# EAGLE board 12T_FULL_BRIDGE (EAGLE 9.1.3)
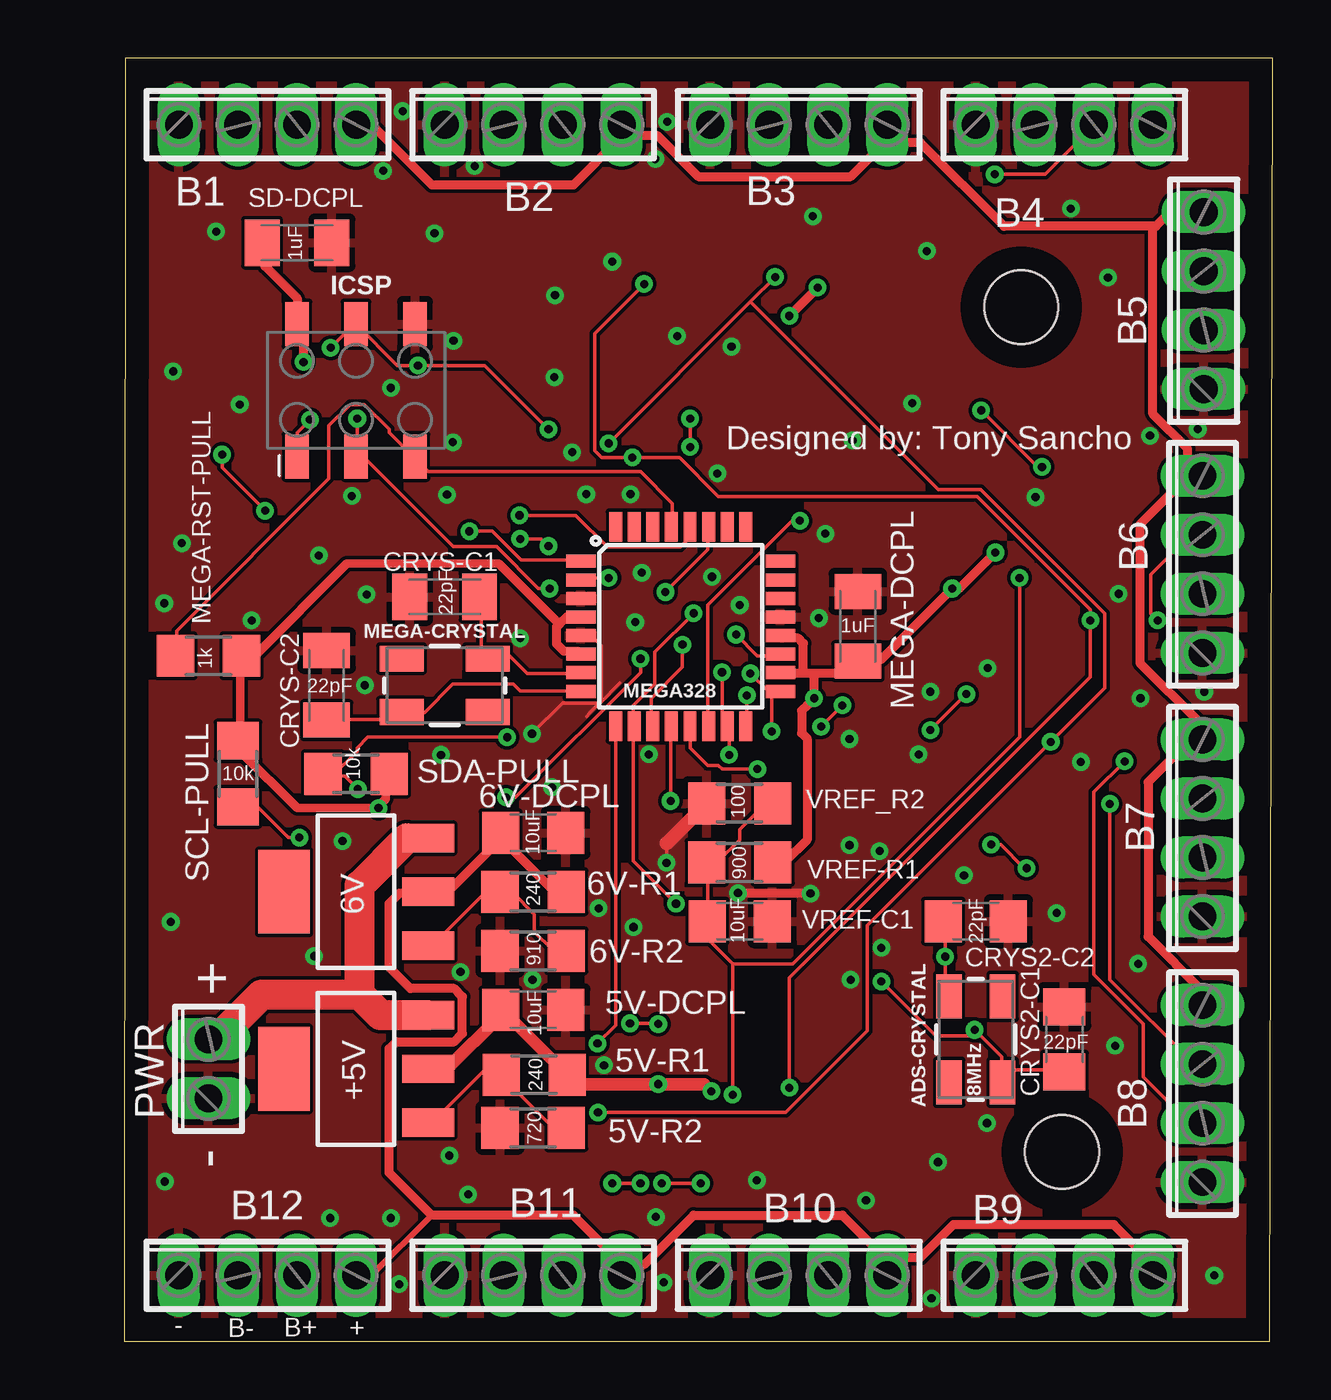
[diagram p0: board, top side]
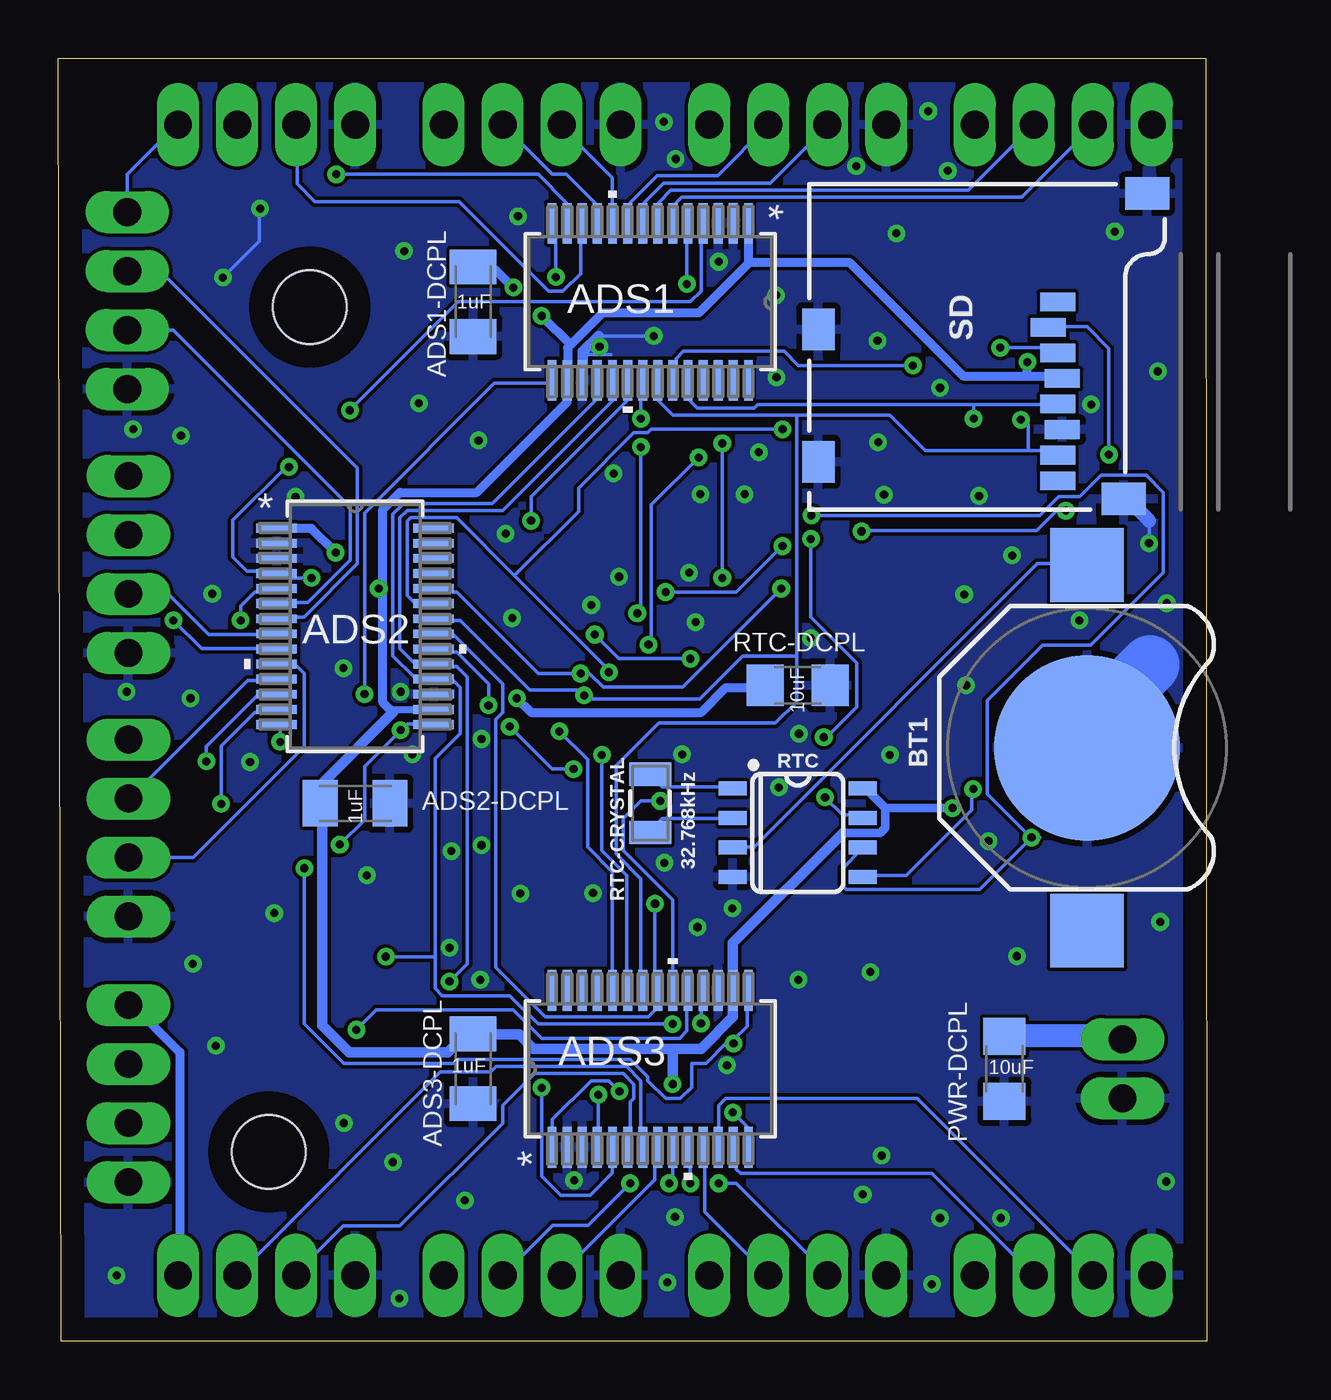
[diagram p1: board, bottom side, seen from below]

Size 49.43 x 55.25 mm. Coordinates in mm from the lower left corner, seen from the top.
Outline: 0,0 49.31,0 49.43,55.24 0.05,55.24 0,0
Copper layers (1*16): Top 0.035mm / dielectric 1.5mm / Bottom 0.035mm
Design rules "default": minimum track width 6mil, minimum drill 0.35mm, track to track 6mil, track to pad 6mil, pad to pad 6mil, via to via 6mil, smd to smd 6mil, copper to edge 40mil, drill to drill 6mil, minimum pad ring 10mil, minimum via ring 8mil, stop-mask expansion 4mil, vias tented up to drill 0mil, thermal gap 10mil
Holes 3.17 mm at 38.61,44.53 40.36,8.15

## Footprints (pad centres in the part's own frame; a part is rotated, then mirrored left to right if it is on the bottom)
C1206 = smd 1.6 x 1.8: 1 -1.4,0; 2 1.4,0
R1206 = smd 1.6 x 1.803: 1 -1.422,0; 2 1.422,0
SOT223 = smd 1.219 x 2.235: 1 -2.311,-3.099; 2 0,-3.099; 3 2.311,-3.099 | smd 3.6 x 2.2: 4 0,3.099
DB28-L = smd 1.753 x 0.381: 1 -3.378,4.225; 2 -3.378,3.575; 3 -3.378,2.925; 4 -3.378,2.275; 5 -3.378,1.625; 6 -3.378,0.975; 7 -3.378,0.325; 8 -3.378,-0.325; 9 -3.378,-0.975; 10 -3.378,-1.625; 11 -3.378,-2.275; 12 -3.378,-2.925; 13 -3.378,-3.575; 14 -3.378,-4.225; 15 3.378,-4.225; 16 3.378,-3.575; 17 3.378,-2.925; 18 3.378,-2.275; 19 3.378,-1.625; 20 3.378,-0.975; 21 3.378,-0.325; 22 3.378,0.325; 23 3.378,0.975; 24 3.378,1.625; 25 3.378,2.275; 26 3.378,2.925; 27 3.378,3.575; 28 3.378,4.225
C1206K = smd 1.5 x 2: 1 -1.5,0; 2 1.5,0
CRYSTAL-SMD-5X3.2-4PAD = smd 1.9 x 1.1: 1 -1.85,-1.15; 2 1.85,-1.15; 3 1.85,1.15; 4 -1.85,1.15
4POL254 = drill 1.2 long: 1 -3.81,0; 2 -1.27,0; 3 1.27,0; 4 3.81,0
BATTCON_12MM = smd 8 x 8: GND 0,0 | smd 3.175 x 3.175: PWR@1 -7.874,0; PWR@2 7.874,0
2X3_SMD = smd 1.02 x 1.9: 1 -2.54,-2.85; 2 -2.54,2.85; 3 0,-2.85; 4 0,2.85; 5 2.54,-2.85; 6 2.54,2.85
TQFP32-08 = smd 1.27 x 0.559: 1 -4.293,2.8; 2 -4.293,2; 3 -4.293,1.2; 4 -4.293,0.4; 5 -4.293,-0.4; 6 -4.293,-1.2; 7 -4.293,-2; 8 -4.293,-2.8; 17 4.293,-2.8; 18 4.293,-2; 19 4.293,-1.2; 20 4.293,-0.4; 21 4.293,0.4; 22 4.293,1.2; 23 4.293,2; 24 4.293,2.8 | smd 0.559 x 1.27: 9 -2.8,-4.293; 10 -2,-4.293; 11 -1.2,-4.293; 12 -0.4,-4.293; 13 0.4,-4.293; 14 1.2,-4.293; 15 2,-4.293; 16 2.8,-4.293; 25 2.8,4.293; 26 2,4.293; 27 1.2,4.293; 28 0.4,4.293; 29 -0.4,4.293; 30 -1.2,4.293; 31 -2,4.293; 32 -2.8,4.293
2POL254 = drill 1.2 long: 1 -1.27,0; 2 1.27,0
SO08-0.15 = smd 0.6 x 1.2: 1 -1.905,-2.8; 2 -0.635,-2.8; 3 0.635,-2.8; 4 1.905,-2.8; 5 1.905,2.8; 6 0.635,2.8; 7 -0.635,2.8; 8 -1.905,2.8
CRYSTAL-SMD-3.2X1.5MM = smd 1 x 1.8: P$1 -1.25,0; P$2 1.25,0
MICRO-SD-SOCKET = smd 1.8 x 1.4: CD1 -2.05,0.4; CD2 -7.75,0.4 | smd 0.8 x 1.5: CS -7.84,10.3; DI -6.74,10.7; DO -2.34,10.7; GND -3.44,10.9; RSV1 -8.94,10.7; RSV2 -1.24,10.7; SCLK -4.54,10.7; VCC -5.64,10.9 | smd 1.4 x 1.9: GND1 -13.6,14.55; GND3 -0.45,13.55

## Placement (x,y rotation side)
5V-DCPL  10uF  [C1206]  17.6,14.27 0 top
5V-R1  240  [R1206]  17.65,11.48 0 top
5V-R2  720  [R1206]  17.6,9.19 0 top
6V-DCPL  10uF  [C1206]  17.6,21.89 0 top
6V-R1  240  [R1206]  17.6,19.35 0 top
6V-R2  910  [R1206]  17.6,16.81 0 top
+5V  V_REG_317SMD  [SOT223]  9.98,11.73 90 top
ADS1  ADS1256IDBRDB28-L  [DB28-L]  23.95,44.75 270 bottom
ADS1-DCPL  1uF  [C1206K]  31.57,44.75 270 bottom
ADS2  ADS1256IDBRDB28-L  [DB28-L]  36.65,30.78 0 bottom
ADS2-DCPL  1uF  [C1206K]  36.65,23.16 0 bottom
ADS3  ADS1256IDBRDB28-L  [DB28-L]  23.95,11.73 90 bottom
ADS3-DCPL  1uF  [C1206K]  31.57,11.73 270 bottom
ADS-CRYSTAL  8MHz  [CRYSTAL-SMD-5X3.2-4PAD]  36.65,13 90 top
B1  [4POL254]  6.17,52.37 0 top
B2  [4POL254]  17.6,52.37 0 top
B3  [4POL254]  29.03,52.37 0 top
B4  [4POL254]  40.46,52.37 0 top
B5  [4POL254]  46.46,44.81 90 top
B6  [4POL254]  46.41,33.45 90 top
B7  [4POL254]  46.41,22.1 90 top
B8  [4POL254]  46.41,10.67 90 top
B9  [4POL254]  40.46,2.84 0 top
B10  [4POL254]  29.03,2.84 0 top
B11  [4POL254]  17.6,2.84 0 top
B12  [4POL254]  6.17,2.84 0 top
BT1  [BATTCON_12MM]  5.16,25.55 270 bottom
CRYS2-C1  22pF  [C1206]  40.46,13 90 top
CRYS2-C2  22pF  [C1206]  36.65,18.08 0 top
CRYS-C1  22pF  [C1206K]  13.79,32.05 0 top
CRYS-C2  22pF  [C1206K]  8.71,28.24 90 top
GAUGE  V_REG_317SMD  [SOT223]  9.98,19.35 90 top
ICSP  [2X3_SMD]  9.98,40.94 0 top
MEGA328  ATMEGA328P_TQFP  [TQFP32-08]  23.95,30.78 0 top
MEGA-CRYSTAL  16MHz  [CRYSTAL-SMD-5X3.2-4PAD]  13.79,28.24 0 top
MEGA-DCPL  1uF  [C1206K]  31.57,30.78 90 top
MEGA-RST-PULL  1k  [R1206]  3.63,29.51 0 top
PWR  [2POL254]  3.63,11.73 90 top
PWR-DCPL  10uF  [C1206]  8.71,11.73 90 bottom
RTC  DS1307Z  [SO08-0.15]  17.6,21.89 270 bottom
RTC-CRYSTAL  32.768kHz  [CRYSTAL-SMD-3.2X1.5MM]  23.95,23.16 90 bottom
RTC-DCPL  10uF  [C1206]  17.6,28.24 0 bottom
SCL-PULL  10k  [R1206]  4.9,24.43 90 top
SD  MICRO-SD_CARD_SOCKET  [MICRO-SD-SOCKET]  17.12,35.81 270 bottom
SD-DCPL  1uF  [C1206K]  7.44,47.29 0 top
SDA-PULL  10k  [R1206]  9.98,24.43 0 top
VREF-C1  10uF  [C1206]  26.49,18.08 0 top
VREF-R1  900  [R1206]  26.49,20.62 0 top
VREF_R2  100  [R1206]  26.49,23.16 0 top

## Library data of the parts
5V-DCPL 6V-DCPL ADS1-DCPL ADS2-DCPL ADS3-DCPL CRYS2-C1 CRYS2-C2 CRYS-C1 CRYS-C2 MEGA-DCPL PWR-DCPL RTC-DCPL VREF-C1 = rcl; SPICEPREFIX: C
5V-R1 5V-R2 6V-R1 6V-R2 MEGA-RST-PULL VREF-R1 VREF_R2 = rcl; SPICEPREFIX: R
+5V GAUGE = SparkFun-IC-Power
ADS1-ADS3 = ADS1256; MANUFACTURER_PART_NUMBER: ADS1256IDBR; VENDOR: Texas Instruments
ADS-CRYSTAL = SparkFun-Clocks; PROD_ID: XTAL-09431
B1-B12 PWR = con-phoenix-254; OC_FARNELL: unknown; OC_NEWARK: unknown
BT1 = SparkFun-Batteries; PROD_ID: BATT-08044; SF_SKU: PRT-10592
ICSP = SparkFun-Connectors; PROD_ID: CONN-11290
MEGA328 = SparkFun-IC-Microcontroller; PROD_ID: IC-09069
MEGA-CRYSTAL = SparkFun-Clocks; PROD_ID: XTAL-08218; SF_ID: COM-00094
RTC = SparkFun-Clocks; PROD_ID: IC-08138
RTC-CRYSTAL = SparkFun-Clocks; PROD_ID: XTAL-13062
SCL-PULL SD-DCPL SDA-PULL = resistor
SD = SparkFun-Connectors; PROD_ID: CONN-07820; SF_ID: PRT-00127

## Nets
+3V: BT1.PWR@1 RTC.3
+5V: 5V-DCPL.1 5V-R1.2 +5V.2 ADS1-DCPL.1 ADS1.1 ADS1.16 ADS2-DCPL.1 ADS2.1 ADS2.16 ADS3-DCPL.1 ADS3.1 ADS3.16 ICSP.2 MEGA328.4 MEGA328.6 MEGA328.18 MEGA328.20 MEGA-DCPL.1 MEGA-RST-PULL.2 RTC-DCPL.1 RTC.8 SCL-PULL.2 SD-DCPL.1 SD.VCC SDA-PULL.2 VREF-R1.2
+12V: +5V.3 GAUGE.3 PWR-DCPL.2 PWR.2
ADS1-CS: ADS1.20 MEGA328.14
ADS2-CS: ADS2.20 MEGA328.13
ADS3-CS: ADS3.20 MEGA328.12
ADS-DRDY: ADS1.21 ADS2.21 ADS3.21 MEGA328.10
ADS-RESET: ADS1.15 ADS2.15 ADS3.15 MEGA328.9
ADS-SYNC: ADS1.14 ADS2.14 ADS3.14 MEGA328.2
ADS-XTAL1: ADS1.19 ADS2.19 ADS3.19 ADS-CRYSTAL.1 CRYS2-C1.1
ADS-XTAL2: ADS1.18 ADS2.18 ADS3.18 ADS-CRYSTAL.3 CRYS2-C2.1
AINCOM: ADS1.5 ADS2.5 ADS3.5 MEGA328.11
B1+: ADS1.7 B1.3
B1-: ADS1.6 B1.2
B2+: ADS1.9 B2.3
B2-: ADS1.8 B2.2
B3+: ADS1.11 B3.3
B3-: ADS1.10 B3.2
B4+: ADS1.13 B4.3
B4-: ADS1.12 B4.2
B5+: ADS2.7 B5.3
B5-: ADS2.6 B5.2
B6+: ADS2.9 B6.3
B6-: ADS2.8 B6.2
B7+: ADS2.11 B7.3
B7-: ADS2.10 B7.2
B8+: ADS2.13 B8.3
B8-: ADS2.12 B8.2
B9+: ADS3.7 B9.3
B9-: ADS3.6 B9.2
B10+: ADS3.9 B10.3
B10-: ADS3.8 B10.2
B11+: ADS3.11 B11.3
B11-: ADS3.10 B11.2
B12+: ADS3.13 B12.3
B12-: ADS3.12 B12.2
GND: 5V-DCPL.2 5V-R2.1 6V-DCPL.2 6V-R2.1 ADS1-DCPL.2 ADS1.2 ADS1.3 ADS1.17 ADS2-DCPL.2 ADS2.2 ADS2.3 ADS2.17 ADS3-DCPL.2 ADS3.2 ADS3.3 ADS3.17 B1.1 B2.1 B3.1 B4.1 B5.1 B6.1 B7.1 B8.1 B9.1 B10.1 B11.1 B12.1 BT1.GND CRYS2-C1.2 CRYS2-C2.2 CRYS-C1.1 CRYS-C2.2 ICSP.6 MEGA328.3 MEGA328.5 MEGA328.21 MEGA-DCPL.2 PWR-DCPL.1 PWR.1 RTC-DCPL.2 RTC.4 SD-DCPL.2 SD.CD1 SD.CD2 SD.GND SD.GND1 SD.GND3 VREF-C1.2 VREF_R2.1
MEGA-RESET: ICSP.5 MEGA328.29 MEGA-RST-PULL.1
MEGA-XTAL1: CRYS-C1.2 MEGA328.7 MEGA-CRYSTAL.3
MEGA-XTAL2: CRYS-C2.1 MEGA328.8 MEGA-CRYSTAL.1
MISO: ADS1.22 ADS2.22 ADS3.22 ICSP.1 MEGA328.16 SD.DO
MOSI: ADS1.23 ADS2.23 ADS3.23 ICSP.4 MEGA328.15 SD.DI
N$5: 5V-R1.1 5V-R2.2 +5V.1
N$11: 6V-R1.1 6V-R2.2 GAUGE.1
N$19: RTC-CRYSTAL.P$2 RTC.1
N$20: RTC-CRYSTAL.P$1 RTC.2
SCK: ADS1.24 ADS2.24 ADS3.24 ICSP.3 MEGA328.17 SD.SCLK
SCL: MEGA328.28 RTC.6 SCL-PULL.1
SD-CS: MEGA328.1 SD.CS
SDA: MEGA328.27 RTC.5 SDA-PULL.1
SQW: MEGA328.19 RTC.7
VCC: 6V-DCPL.1 6V-R1.2 B1.4 B2.4 B3.4 B4.4 B5.4 B6.4 B7.4 B8.4 B9.4 B10.4 B11.4 B12.4 GAUGE.2
VREF: ADS1.4 ADS2.4 ADS3.4 VREF-C1.1 VREF-R1.1 VREF_R2.2

## Tracks (layer width: path | path; a pad name or v marks a point on that pad's centre or on a via)
+3V
  Bottom 0.152: RTC.3 20.4,21.28 19.48,21.28 7.29,33.48 5.21,33.48 BT1.PWR@1
+5V  (via drill 0.35)
  Top 0.152: 31.06,28.75 31.52,29.21 MEGA-DCPL.1 31.67,29.36 | 28.32,28.75 MEGA328.18 | 28.32,30.28 MEGA328.20 | 28.47,20.68 28.02,20.68 VREF-R1.2 | 6.07,47.19 SD-DCPL.1 | 19.63,31.19 MEGA328.4 | 5,25.86 SCL-PULL.2 5,25.7 5,25.4 | 5,29.51 MEGA-RST-PULL.2 5.61,29.51 | 10.64,22.96 10.8,23.11 10.91,23 v10.95,22.96 | 11.25,24.33 SDA-PULL.2 | 19.63,11.07 19.23,11.48 5V-R1.2 | 16.28,14.27 5V-DCPL.1 | 5V-R1.2 | 7.72,43.52 ICSP.2 | +5V.2 13.89,11.73 | 19.53,29.72 MEGA328.6
  Top 0.356: 19.53,29.72 18.92,29.72 | 19.63,31.19 19.05,31.19 | 5,29.51 5,25.86 | 11.25,24.33 11.25,23.34 10.91,23 | 10.64,22.96 7.44,22.96 5,25.4 | 18.73,30.87 18.49,31.11 16.13,33.48 9.58,33.48 5.61,29.51
  Top 0.381: 31.06,28.75 29.69,28.75 | 29.69,28.75 29.24,28.75 | 28.32,30.28 29.01,30.28 29.24,30.05 29.24,28.75 | v37.49,33.96 35.94,32.41 v35.64,32.41 32.59,29.36 31.67,29.36 | 28.47,20.68 29.39,21.59 29.39,25.96 29.16,26.19 29.16,27.15 29.39,27.38 v29.69,27.69 29.69,28.75 | ICSP.2 7.44,44.91 6.07,46.28 6.07,47.19 | v28.63,44.14 v29.85,45.36 | v7.72,42.16 7.72,43.52 | 19.05,31.19 18.73,30.87 18.62,30.76 18.62,30.02 18.92,29.72 | 29.24,28.75 28.32,28.75
  Top 0.533: 13.89,11.73 16.2,14.04 5V-DCPL.1 | v25.27,10.77 24.97,11.07 v22.99,11.07 19.63,11.07 | 5V-R1.2 16.28,14.27
  Bottom 0.152: 39.9,35 ADS2.1 | 19.02,28.14 RTC-DCPL.1 | 6.28,41.55 SD.VCC | 19.73,46.46 ADS1.1 | 27.51,41.38 ADS1.16 27.53,41.35 | 31.52,46.13 ADS1-DCPL.1 | v25.27,10.77 25.73,11.23 26.49,11.23 28.17,9.55 28.17,8.48 ADS3.1 | 38.07,24.03 38.07,23.27 ADS2-DCPL.1 38.07,23.11 | ADS2.16 | 31.52,13.21 ADS3-DCPL.1 31.88,13.23 | 20.4,15.04 ADS3.16 20.4,15.13 | 35.46,32.41 v35.64,32.41 | 35.03,27.08 35.15,27.2
  Bottom 0.305: 35.15,27.2 ADS2.16
  Bottom 0.356: 13.84,22.96 14.68,23.8 RTC.8 | 13.84,22.96 13.84,22.1 14.05,21.89 15.65,21.89 | 13.84,22.96 v10.95,22.96
  Bottom 0.381: 39.9,35 38.53,35 v37.49,33.96 | 19.02,28.14 20.7,28.14 21.77,27.08 29.08,27.08 v29.69,27.69 | 7.72,41.55 10.49,41.55 15.39,46.46 19.73,46.46 | 7.72,41.55 6.28,41.55 | 27.51,41.38 27.51,42.77 27.38,42.9 | 27.38,42.9 26.01,44.27 21.87,44.27 19.74,46.41 ADS1.1 | 31.52,46.13 30.61,46.13 v29.85,45.36 | 27.38,42.9 v28.63,44.14 | 7.72,41.55 v7.72,42.16 | 27.53,41.35 27.53,40.44 31.42,36.55 34.72,36.55 35.46,35.81 35.46,32.41 35.46,27.51 35.15,27.2
  Bottom 0.457: 38.07,24.03 35.03,27.08 | 15.65,21.89 20.4,17.14 20.4,15.13 | 31.52,13.21 29.59,13.21 28.98,12.6 22.99,12.6 | 22.99,12.6 21.77,12.6 20.4,13.97 20.4,15.04 | 38.07,23.11 38.07,13.61 36.91,12.45 32.66,12.45 31.88,13.23 | 22.99,12.6 22.99,12.57 v22.99,11.07
+12V
  Top 0.152: 4.04,13.06 3.63,13.06 PWR.2 | 12.17,21.67 GAUGE.3
  Top 1.295: 4.04,13.06 5.92,14.93 10.13,14.93 | 12.17,21.67 10.13,19.63 10.13,15.9 10.13,14.93 | 10.13,14.93 11.02,14.05 +5V.3
  Bottom 0.152: 3.63,13.16 PWR.2
  Bottom 0.991: 3.63,13.16 8.69,13.16 PWR-DCPL.2
ADS1-CS  (via drill 0.35)
  Top 0.152: MEGA328.14 25.12,26.62 25.12,31.7 28.75,35.33 v29.08,35.33
  Bottom 0.152: v29.08,35.33 29.08,36.37 24.97,40.49 24.97,41.25 ADS1.20
ADS2-CS  (via drill 0.35)
  Top 0.152: v27.25,24.64 25.73,24.64 25.58,24.79 25.12,24.79 24.36,25.55 24.36,26.47 MEGA328.13 | v30.91,27.38 v30,26.47
  Bottom 0.152: v27.25,24.64 28.17,24.64 v30,26.47 | v30.91,27.38 30.91,28.3 32.28,29.67 33.2,29.67 ADS2.20
ADS3-CS  (via drill 0.35)
  Top 0.152: v23.52,23.27 23.52,26.46 MEGA328.12
  Bottom 0.152: v23.52,23.27 24.36,23.27 25.12,22.5 25.12,21.13 22.99,19 22.99,15.19 ADS3.20
ADS-DRDY  (via drill 0.35)
  Top 0.152: v23.75,18.85 21.92,20.68 21.92,26.47 MEGA328.10 21.92,26.62 21.92,27.38 22.83,28.3 22.83,29.67 v24.51,31.34 | v24.36,38.51 v24.36,39.73
  Bottom 0.152: v23.75,18.85 23.75,15.19 ADS3.21 23.75,15.04 23.75,14.25 24.03,13.97 28.47,13.97 30.61,16.1 30.61,26.77 30.3,27.08 30.3,28.3 32.44,30.43 33.2,30.43 ADS2.21 | v24.36,39.73 24.36,41.25 ADS1.21 | v24.36,38.51 24.36,31.5 v24.51,31.34
ADS-RESET  (via drill 0.35)
  Top 0.152: v20.37,12.83 21.16,13.61 21.16,26.47 MEGA328.9 | v37.31,21.39 37.72,21.39 38.74,20.37 v38.84,20.37 | v36.25,27.86 v34.7,26.31
  Bottom 0.152: ADS3.15 19.79,15.04 19.79,13.56 20.37,12.98 v20.37,12.83 20.7,12.83 21.55,11.98 22.16,11.98 22.17,11.96 22.17,10.95 22.66,10.46 23.29,10.46 24.05,11.23 24.05,11.38 24.82,12.14 32.23,12.14 32.4,11.98 37.15,11.98 38.84,13.66 v38.84,20.37 | v36.25,27.86 36.25,35.66 30.66,41.25 28.32,41.25 ADS1.15 | v37.31,21.39 36.25,22.45 36.25,24.74 34.7,26.29 v34.7,26.31 34.67,26.31 34.42,26.57 33.28,26.57 ADS2.15
ADS-SYNC  (via drill 0.35)
  Top 0.152: v20.85,32.87 19.79,32.87 MEGA328.2 | v28.02,45.82 26.95,44.75 | 26.95,44.75 v20.85,38.66 | v20.4,9.85 28.47,9.85 31.98,13.36 31.98,17.91 v39.88,25.81 42.19,28.12 42.19,31.34 36.86,36.68 35.03,36.68 26.95,44.75
  Bottom 0.152: v20.85,38.66 v20.85,32.87 | v28.02,45.82 28.02,47.95 28.17,48.11 ADS1.14 | v20.4,9.85 19.79,9.25 19.79,8.48 ADS3.14 | v39.88,25.81 39.88,26.44 39.9,26.47 ADS2.14
ADS-XTAL1  (via drill 0.35)
  Top 0.152: 37.77,11.68 37.77,11.23 ADS-CRYSTAL.1 37.77,11.68 | 37.77,11.68 37.77,12.24 v36.6,13.41 36.86,13.16 34.93,13.16 v32.59,15.49 | 37.77,11.68 40.36,11.68 CRYS2-C1.1
  Bottom 0.152: ADS1.19 25.58,41.25 25.58,40.49 30.3,35.76 34.42,35.76 34.72,35.46 34.72,29.82 34.11,29.21 33.35,29.21 ADS2.19 33.2,29.06 32.28,29.06 31.83,28.6 31.83,16.26 v32.59,15.49 | v36.6,13.41 35.74,14.27 29.85,14.27 28.63,13.06 22.68,13.06 22.38,13.36 22.38,15.04 ADS3.19
ADS-XTAL2  (via drill 0.35)
  Top 0.152: CRYS2-C2.1 35.33,18.08 v35.33,16.56 35.33,15.04 35.48,14.88 ADS-CRYSTAL.3 | v21.77,13.69 22.96,13.69 v22.99,13.66
  Bottom 0.152: v21.77,13.69 21.77,15.04 ADS3.18 | v22.99,13.66 28.78,13.66 30,14.88 32.89,14.88 33.2,15.19 33.2,16.56 | 33.2,16.56 33.2,25.09 32.13,26.16 32.13,28.14 32.44,28.45 33.2,28.45 ADS2.18 33.35,28.6 34.11,28.6 35.03,29.51 35.03,35.61 34.57,36.07 30.76,36.07 26.34,40.49 26.34,41.25 ADS1.18 | 33.2,16.56 v35.33,16.56
AINCOM  (via drill 0.35)
  Top 0.152: v24.03,30 24.03,29.03 22.68,27.69 22.68,26.62 MEGA328.11 | v22.38,45.52 20.24,43.38 20.24,38.35 20.55,38.05 v21.87,38.05 23.9,38.05 25.58,36.37 36.7,36.37 41.58,31.5 v41.58,31.04 41.58,28.6 28.63,15.65 v28.63,10.92
  Bottom 0.152: v21.87,38.05 23.9,36.02 23.9,30.12 v24.03,30 | v22.38,45.52 22.38,48.11 ADS1.5 | v28.63,10.92 28.63,7.11 27.81,6.3 26.54,6.3 25.58,7.26 25.58,8.33 ADS3.5 | v41.58,31.04 41.58,31.65 40.97,32.26 40.06,32.26 ADS2.5
B1+
  Bottom 0.152: B1.3 10.26,49.56 23.06,49.56 23.6,49.02 23.6,48.26 ADS1.7
B1-
  Bottom 0.152: ADS1.6 22.83,48.26 22.83,49.02 22.61,49.25 7.98,49.25 4.85,52.37 B1.2
B2+
  Bottom 0.152: B2.3 21.06,50.19 23.65,50.19 24.82,49.02 24.82,48.26 ADS1.9
B2-
  Bottom 0.152: ADS1.8 24.21,48.26 24.21,49.02 23.37,49.86 18.8,49.86 16.28,52.37 B2.2
B3+
  Bottom 0.152: B3.3 28.17,50.24 27.56,50.24 26.34,49.02 26.34,48.26 ADS1.11
B3-
  Bottom 0.152: ADS1.10 25.58,48.26 25.58,50.09 27.86,52.37 B3.2
B4+  (via drill 0.35)
  Top 0.152: v37.47,50.24 39.65,50.24 41.73,52.32 B4.3
  Bottom 0.152: v37.47,50.24 28.78,50.24 27.56,49.02 27.56,48.26 ADS1.13
B4-
  Bottom 0.152: ADS1.12 26.95,48.11 26.95,45.97 27.71,45.21 28.32,45.21 32.18,49.07 38.38,49.07 39.14,49.83 39.14,52.37 B4.2
B5+
  Bottom 0.152: ADS2.7 39.9,31.19 38.84,31.19 36.55,33.48 36.55,37.59 44.93,45.97 46.46,45.97 B5.3
B5-
  Bottom 0.152: B5.2 44.48,43.54 36.86,35.92 36.86,33.63 38.68,31.8 39.9,31.8 ADS2.6
B6+  (via drill 0.35)
  Top 0.152: v44.48,31.04 44.17,31.34 44.17,33.02 45.85,34.7 46.3,34.7 B6.3
  Bottom 0.152: v44.48,31.04 43.26,29.82 40.06,29.82 ADS2.9
B6-
  Bottom 0.152: ADS2.8 40.06,30.43 42.95,30.43 44.63,32.11 46.3,32.11 B6.2
B7+
  Bottom 0.152: ADS2.11 40.06,28.45 41.28,28.45 46.3,23.42 B7.3
B7-
  Bottom 0.152: B7.2 43.61,20.83 38.84,25.6 38.84,28.75 39.14,29.06 39.9,29.06 ADS2.10
B8+  (via drill 0.35)
  Top 0.152: v42.42,23.14 42.42,15.57 46,11.99 46.3,11.99 B8.3
  Bottom 0.152: v42.42,23.14 42.42,25.63 40.97,27.08 40.06,27.08 ADS2.13
B8-  (via drill 0.35)
  Top 0.152: v43.05,24.97 41.73,23.65 41.73,15.8 43.87,13.66 43.87,11.38 45.85,9.4 B8.2
  Bottom 0.152: v43.05,24.97 43.05,25.6 40.82,27.84 40.06,27.84 ADS2.12
B9+
  Bottom 0.152: B9.3 32.98,11.59 30.82,11.59 30.58,11.84 24.97,11.84 24.36,11.23 24.36,8.48 ADS3.7
B9-
  Bottom 0.152: ADS3.6 24.82,8.48 24.82,10.31 24.66,10.46 24.66,11.07 25.12,11.53 28.93,11.53 30.3,10.16 30.3,9.4 34.72,4.98 37.16,4.98 39.29,2.84 B9.2
B10+  (via drill 0.35)
  Top 0.152: v24.82,6.81 v23.14,6.81
  Bottom 0.152: v23.14,6.81 22.99,6.96 22.99,8.33 ADS3.9 | B10.3 28.14,5 26.62,5 v24.82,6.81
B10-
  Bottom 0.152: ADS3.8 23.75,8.33 23.75,6.96 27.86,2.84 B10.2
B11+
  Bottom 0.152: B11.3 21.62,5.59 21.62,8.33 ADS3.11
B11-  (via drill 0.35)
  Top 0.152: v21.01,6.81 v22.23,6.81
  Bottom 0.152: v22.23,6.81 22.23,8.33 ADS3.10 | v21.01,6.81 20.24,6.81 16.28,2.84 B11.2
B12+
  Bottom 0.152: B12.3 11.84,7.24 20.07,7.24 20.24,7.42 20.24,8.33 ADS3.13
B12-
  Bottom 0.152: 6.68,4.67 4.85,2.84 B12.2 | 6.68,4.67 12.47,10.46 20.7,10.46 21.01,10.16 21.01,8.48 ADS3.12 | 6.68,4.67
GND  (via drill 0.35)
  Top 0.152: v17.55,26.16 18.87,27.48 20.44,27.48 | MEGA328.5 20.1,30.38 20.15,30.34 20.52,29.96 20.52,27.61 | 20.52,27.61 20.6,27.61 | v23.34,20.6 23.34,21.44 | 20.52,27.56 20.52,27.61 | 20.44,27.48 20.44,27.45 21.34,28.35 | 20.44,27.48 20.04,27.08 20.04,27.05 19.9,26.91 | 29.52,19.3 v29.54,19.28
  Top 0.178: 20.44,27.48 20.52,27.56
  Top 0.381: v26.42,19.3 29.52,19.3
  Top 0.61: 23.34,21.44 VREF_R2.1
  Bottom 0.152: v42.34,45.8 40.77,47.37 40.77,48.74 v40.74,48.77 | BT1.GND 5.16,26.42 | v2.49,34.37 2.49,35.34 | ADS1.17 26.85,41.4 | 26.17,43.28 v23.8,43.28 | 26.85,42.6 26.72,42.47 26.53,42.47 26.51,42.48 25.65,42.48
  Bottom 0.457: 26.85,41.4 26.85,42.6 26.17,43.28
  Bottom 0.61: 2.49,35.34 3.42,36.26 SD.GND3
  Bottom 2.54: 5.16,26.42 2.44,29.13
  other vias: 2.01,18.06 1.75,6.88 11.84,2.46 14.81,6.32 23.22,2.54 22.89,5.36 31.93,6.07 35.03,7.72 34.75,1.85 42.65,12.73 43.64,16.26 40.13,18.44 36.14,20.07 34.19,25.27 29.64,48.44 18.54,45.03 13.36,47.7 2.11,41.76 1.73,31.78 13.89,36.45 9.8,36.4 4.98,40.34 11.48,41.05 18.52,41.5 14.17,43.08 21.01,46.48 11.15,50.39 11.99,52.96 15.09,50.6 23.37,52.5 22.86,50.9 33.91,40.39 39.22,36.35 44.15,38.99 46.2,39.27 43.74,27.69 34.54,46.94 22.58,25.27 20.42,18.64 18.41,23.85 34.7,27.97 27.23,6.93 10.44,32.16 37.16,28.98 46.48,27.97 14.48,15.9 17.58,15.57 11.48,5.31 46.91,2.84 14.15,38.71 8.38,33.83 37.13,9.4 14,8 8.86,5.31 13.64,25.25 9.4,21.54 5.49,31.04 10.36,28.24 19.89,36.47 19.28,38.28 21.79,36.47 22.28,33.1 29.9,31.14 30.18,34.77 41.17,24.94 22,30.96 25.3,32.92 26.49,31.7 31.22,21.36 32.51,21.11 31.22,25.93 32.59,16.94 26.14,42.82 25.53,37.36 31.34,38.79 21.92,17.83 31.27,15.57 20.65,11.89 42.8,32.18 3.96,47.78 8.18,16.59 17.04,30.28
  pour Top: -0.2,55.07 -0.2,0.25 -0.18,0.23 48.72,0.23 48.9,0.05 48.9,54.79 48.62,55.07
  pour Bottom: -0.18,55.07 -0.18,0.3 48.9,0.3 48.9,55.07
MEGA-RESET
  Top 0.152: 12.47,38.05 13.08,37.44 22.23,37.44 23.6,36.07 23.6,35.15 MEGA328.29 | 12.47,38.05 11.4,39.12 11.4,39.27 10.34,40.33 9.73,40.33 8.81,39.42 8.81,37.13 2.26,30.58 2.26,29.51 MEGA-RST-PULL.1 | 12.47,38.05 ICSP.5
MEGA-XTAL1
  Top 0.152: MEGA328.7 19.63,28.75 17.35,28.75 16.59,29.51 15.67,29.51 MEGA-CRYSTAL.3 15.52,29.51 15.37,29.67 15.37,31.95 CRYS-C1.2
MEGA-XTAL2
  Top 0.152: MEGA328.8 19.63,27.99 17.04,27.99 16.74,28.3 14.15,28.3 12.93,27.08 12.01,27.08 MEGA-CRYSTAL.1 11.86,27.08 11.56,26.77 8.81,26.77 CRYS-C2.1
MISO  (via drill 0.35)
  Top 0.152: v26.8,27.81 26.8,26.62 MEGA328.16 | ICSP.1 7.44,39.12 v8,39.67
  Bottom 0.152: ADS2.22 33.2,31.04 32.13,31.04 29.13,28.04 27.03,28.04 v26.8,27.81 26.64,27.66 21.82,27.66 19.96,29.51 17.65,29.51 | 7.7,38.35 12.12,38.35 13.64,39.88 17.65,39.88 | 17.65,39.88 22.99,39.88 23.6,40.49 23.6,41.25 ADS1.22 | SD.DO 6.6,38.35 7.44,38.35 7.7,38.35 | 17.65,39.88 17.65,29.51 | 17.65,29.51 17.65,27.53 18.57,26.62 23.6,26.62 25.43,24.79 25.43,20.98 24.36,19.91 24.36,15.19 ADS3.22 | 7.7,38.35 7.7,39.47 v8,39.67
MOSI  (via drill 0.35)
  Top 0.152: v8.89,42.77 9.93,43.82 ICSP.4 11.76,42.01 v12.65,42.01 15.52,42.01 v18.26,39.27 | v26.04,25.25 26.04,26.47 MEGA328.15 25.88,26.62 25.73,26.77 25.73,27.69 v25.73,28.8
  Bottom 0.152: v8.89,42.77 7.14,42.77 6.99,42.62 6.97,42.62 SD.DI | v12.65,42.01 17.58,42.01 18.19,42.62 22.53,42.62 22.83,42.32 22.83,41.4 ADS1.23 | v26.04,25.25 26.04,21.13 24.97,20.07 24.97,15.19 ADS3.23 | 29.79,32.97 32.28,35.46 34.26,35.46 34.42,35.31 34.42,32.11 34.11,31.8 33.35,31.8 ADS2.23 | v25.73,28.8 25.73,28.9 28.89,32.07 29.79,32.97 | v18.26,39.27 23.9,39.27 24.05,39.12 24.66,39.12 27.04,36.74 27.04,35.72 29.79,32.97
N$5
  Top 0.152: +5V.1 13.08,9.55 13.39,9.55 15.52,11.68 16.03,11.68 5V-R1.1 16.23,11.43 18.42,9.25 18.87,9.25 5V-R2.2
N$11
  Top 0.152: 6V-R2.2 18.87,16.87 18.42,16.87 17.65,17.63 17.65,18.39 16.74,19.3 16.28,19.3 6V-R1.1 16.13,19.3 15.52,19.3 13.39,17.17 13.08,17.17 GAUGE.1
N$19
  Bottom 0.152: RTC.1 20.55,23.88 23.44,23.88 23.9,24.33 RTC-CRYSTAL.P$2
N$20
  Bottom 0.152: RTC.2 20.55,22.5 23.44,22.5 23.9,22.05 RTC-CRYSTAL.P$1
SCK  (via drill 0.35)
  Top 0.152: v10.03,39.73 10.03,38.2 ICSP.3 10.03,38.05 10.34,38.05 14.17,34.21 16.03,34.21 17.83,32.41 v18.31,32.41 | 27.86,27.99 27.71,27.99 v26.95,28.75 | 27.86,27.99 28.17,27.99 MEGA328.17 27.86,27.99 | v27.86,26.26 27.86,27.38 27.86,27.99
  Bottom 0.152: 10.03,40.33 19.33,40.33 19.48,40.18 21.92,40.18 22.23,40.49 22.23,41.25 ADS1.24 | 10.03,40.33 6.46,40.33 SD.SCLK | 10.03,40.33 v10.03,39.73 | ADS2.24 33.2,32.26 32.28,32.26 28.78,28.75 v26.95,28.75 26.57,28.75 25.98,28.17 22.56,28.17 v18.31,32.41 | v27.86,26.26 26.64,25.04 26.64,21.28 25.58,20.22 25.58,15.19 ADS3.24
SCL  (via drill 0.35)
  Top 0.152: SCL-PULL.1 5,23.11 5.64,23.11 7.06,21.69 v7.54,21.69 | v17.02,35.56 19.43,35.56 20.8,34.19 23.93,34.19 24.36,34.62 24.36,35 MEGA328.28
  Bottom 0.152: RTC.6 14.91,21.13 15.67,20.37 15.67,19.61 15.52,19.46 9.78,19.46 v7.54,21.69 7.19,21.69 7.57,21.69 9.45,23.57 9.45,27.58 7.06,29.97 5,29.97 1.88,33.1 1.88,36.55 2.62,37.29 4.55,37.29 5.46,36.37 6.38,36.37 7.19,35.56 v17.02,35.56
SD-CS  (via drill 0.35)
  Top 0.152: v6.07,35.76 4.22,37.62 v4.22,38.18 | MEGA328.1 19.63,33.63 17.09,33.63 15.85,34.87 v14.86,34.87
  Bottom 0.152: v6.07,35.76 6.45,35.76 7.32,34.9 14.86,34.9 v14.86,34.87 | v4.22,38.18 4.22,42.75 5.16,43.69 6.59,43.69 SD.CS
SDA  (via drill 0.35)
  Top 0.152: v10.06,23.77 9.5,24.33 8.97,24.33 | 8.97,24.33 8.66,24.33 SDA-PULL.1 8.97,24.33 | v23.29,32.26 25.12,34.09 25.12,35 MEGA328.27 | v17.04,34.54 17.96,34.54 v18.26,34.24 | v16.48,26.01 10.49,26.01 10.03,25.55 10.03,25.4 8.97,24.33
  Bottom 0.152: RTC.5 14.76,20.07 12.93,20.07 10.11,22.89 10.11,23.72 v10.06,23.77 | v23.29,32.26 20.24,32.26 v18.26,34.24 | v17.04,34.54 17.04,31.19 15.06,29.21 15.06,27.3 16.36,26.01 v16.48,26.01
SQW  (via drill 0.35)
  Top 0.152: v26.34,30.43 27.25,29.51 28.17,29.51 MEGA328.19 | v22.23,29.39 22.23,28.8 16.84,23.42 v16.43,23.42
  Bottom 0.152: v16.43,23.42 15.67,22.66 14.91,22.66 RTC.7 | v22.23,29.39 25.3,29.39 v26.34,30.43
VCC
  Top 0.152: 18.42,19.46 18.87,19.46 6V-R1.2 | 10.64,2.84 B12.4 | 21.31,3.3 21.31,2.84 B11.4 21.31,3.3 | 21.31,3.3 21.31,3.45 | 13.08,19.3 GAUGE.2 13.92,19.35 | 10.67,52.37 B1.4 | 21.31,51.92 21.31,52.37 B2.4 21.31,51.92 | 21.31,51.92 21.31,51.76 | 46.3,26.62 46.3,26.01 B7.4 46.3,25.86 45.85,25.86 | 44.96,48.56 46.46,48.56 B5.4 | 46.41,15.09 B8.4 | 44.17,3.45 44.17,2.84 B9.4 | 16.2,21.64 6V-DCPL.1 16.2,21.67 | 32.74,3.61 32.74,2.84 B10.4 32.74,3.61 | 32.74,51.61 32.74,52.37 B3.4 32.74,51.61 | 46.3,37.13 45.77,37.13 45.69,37.13 B6.4 46.3,37.13
  Top 0.229: 13.23,5.44 10.64,2.84
  Top 0.381: 13.92,19.35 16.2,21.64 | 16.2,21.67 18.42,19.46 | 21.31,3.45 19.33,5.44 13.23,5.44 11.4,7.26 11.4,12.6 11.71,12.9 14.2,12.9 14.55,13.26 14.55,14.83 14.2,15.19 12.32,15.19 11.4,16.1 11.4,18.85 11.86,19.3 13.08,19.3 | 21.31,3.3 22.38,3.3 24.51,5.44 30.91,5.44 32.74,3.61 34.26,3.61 35.69,5.03 42.6,5.03 44.17,3.45 | 10.67,52.37 13.26,49.78 19.33,49.78 21.31,51.76 | 21.31,51.92 22.94,51.92 24.71,50.14 31.27,50.14 32.74,51.61 34.26,51.61 37.87,48.01 44.4,48.01 | 46.3,26.62 43.71,29.21 43.71,35.15 45.69,37.13 | 44.4,48.01 44.96,48.56 | 45.77,37.13 45.77,38.43 44.27,39.93 44.27,47.88 44.4,48.01 | 46.41,15.09 44.07,17.42 44.07,24.08 45.85,25.86
  Bottom 0.152: 46.32,14.57 B8.4 | B5.4 46.46,50.24 44.32,52.37 B4.4
  Bottom 0.381: 46.32,14.57 44.2,12.45 44.2,2.92 B9.4
VREF  (via drill 0.35)
  Top 0.152: 26.19,16.26 v26.19,10.62 | 26.19,16.26 25.12,17.32 25.12,18.08 | 25.12,18.08 25.12,20.52 VREF-R1.1 25.12,20.68 25.58,20.68 26.49,21.59 26.49,22.05 27.56,23.11 27.86,23.11 VREF_R2.2 | 25.12,18.08 VREF-C1.1 | 26.19,16.26 28.78,16.26 38.53,26.01 v38.53,32.87 | v36.88,40.08 39.32,37.64 v39.5,37.64
  Bottom 0.152: v26.19,10.62 26.19,8.48 ADS3.4 | v36.88,40.08 32.21,44.75 22.23,44.75 21.77,45.21 21.77,48.11 ADS1.4 | v38.53,32.87 39.75,32.87 39.9,33.02 ADS2.4 40.06,33.17 41.33,33.17 41.91,33.76 41.91,35.36 39.62,37.64 v39.5,37.64

## Text on the board
tNames: Designed by: Tony Sancho | 6V | + | - | - | B- | B+ | +